# Altium PCB Danfoss302Pi_Interface.PcbDoc
Units mm, origin at the board's own origin, x right, y up, seen from the top; angles counter-clockwise.
Board outline 174 x 70 mm, 2 copper layers (Top Layer, Bottom Layer); 33 components, 49 nets, 239 pads, 36 vias.
Unrouted connection lines stored in the file: 6.
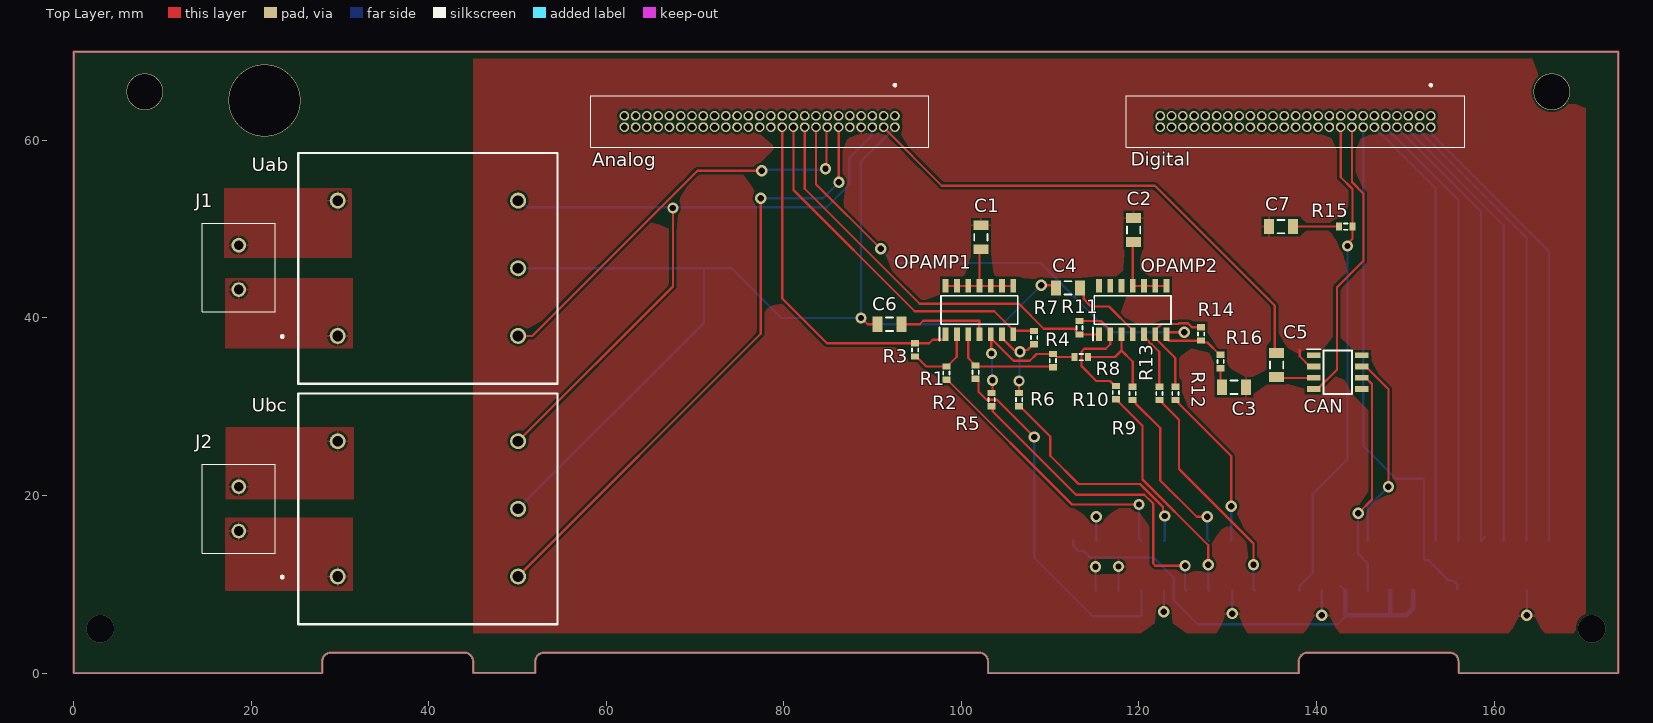
[diagram p0: Top Layer view]
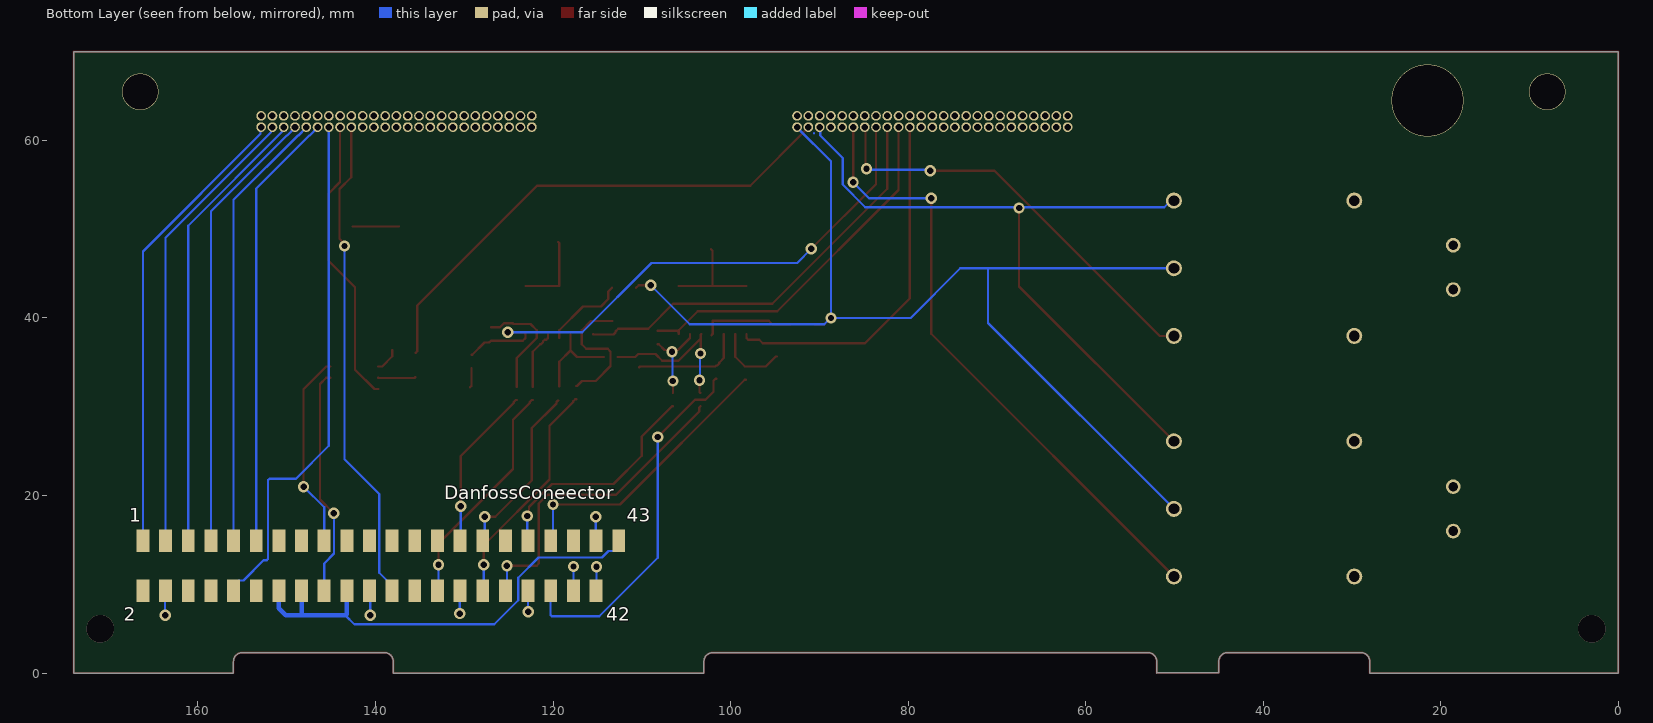
[diagram p1: Bottom Layer view, seen from below]

## Layer stack, top to bottom
Top Solder: solder mask 0.0102, Solder Resist, Dk 3.5
Top Layer: signal copper 0.0356
Dielectric 1: dielectric 0.32, FR-4, Dk 4.8
Bottom Layer: signal copper 0.0356
Bottom Solder: solder mask 0.0102, Solder Resist, Dk 3.5

## Board outline
0,0 28,0 28,1.3 cw(c29,1.3) 29,2.3 43.987,2.3 44,2.313 cw(c44,1.313) 45,1.313 45,0.013 51.987,0.013 52,0 52,1.3 cw(c53,1.3) 53,2.3 102,2.3 cw(c102,1.3) 103,1.3 103,0 138,0 138,1.3 cw(c139,1.3) 139,2.3 155,2.3 cw(c155,1.3) 156,1.3 156,0 174,0 174,70 0,70

## Design rules (kind name [scope] priority, off if disabled: settings)
Clearance [All] p1: gap=0.254 ignorepadtopadclearanceinfootprint=FALSE except(0: Arc-Hole Track-Hole SMDPad-Hole THPad-Hole Via-Hole Fill-Hole Poly-Hole Region-Hole Text-Hole)
PolygonConnect [All] p1: connectstyle=Relief reliefconductorwidth=0.254 reliefentries=4 polygonreliefangle="90 Angle" airgapwidth=0.254
RoomDefinition Danfoss302Pi_Interface [InComponentClass('Danfoss302Pi_Interface')] p1: confinementstyle=ConfineIn formatcopy=TRUE lockcomponents=FALSE outline 175.1,1.5 345.499,1.5 345.499,64.2 175.1,64.2
RoutingVias [All] p1: holewidth=0.711 width=1.27 viastyle="Through Hole" minholewidth=0.711 minwidth=1.27 maxholewidth=0.711 maxwidth=1.27
SolderMaskExpansion [All] p1: expansion=0.102 istentingtop=FALSE
Width [All] p1: maxlimit=0.254 minlimit=0.254 preferedwidth=0.254
30 further rules are at their usual default settings.

## Components (designator, comment, footprint, x,y, rotation, side; value= is the part's Value field where it differs from the comment)
Analog "SHF-125-01-L-D-TH-TR" SHF12501LDTHTR 92.51,62.77 r180 top
C1 "Cap" C1206 102.2,49.1 r90 top value=100pF
C2 "Cap" C1206 119.4,49.9 r90 top value=100pF
C3 "Cap" C1206 130.7,32.2 r0 top value=100pF
C4 "Cap" C1206 112,43.4 r0 top value=100pF
C5 "Cap" C1206 135.5,34.7 r270 top value=100pF
C6 "Cap" C1206 91.9,39.3 r0 top value=100pF
C7 "Cap" C1206 136,50.3 r0 top value=100pF
CAN "L9616" SOIC127P600X175-8N 142.4,33.9 r0 top
DanfossConeector "DanfossConnector" DanfossConnector 166.962,8.03 r180 bottom
Digital "SHF-125-01-L-D-TH-TR" SHF12501LDTHTR 152.88,62.77 r180 top
J1 "282836-2" 2828362 18.6,43.2 r270 top
J2 "282836-2" 2828362 18.6,16 r270 top
OPAMP1 "TLC084ID" SOIC127P600X175-14N 102.03,40.9 r90 top
OPAMP2 "TLC084ID" SOIC127P600X175-14N 119.3,40.9 r90 top
R1 "Res3" J1-0603 98.3,33.8 r90 top value=2200
R2 "Res3" J1-0603 101.6,33.9 r90 top value=2200
R3 "Res3" J1-0603 94.8,36.4 r90 top value=2200
R4 "Res3" J1-0603 110.3,35.2 r90 top value=2200
R5 "Res3" J1-0603 103.4,30.8 r90 top value=2200
R6 "Res3" J1-0603 106.5,30.8 r90 top value=2200
R7 "Res3" J1-0603 108.2,37.8 r90 top value=2200
R8 "Res3" J1-0603 113.5,35.6 r0 top value=2200
R9 "Res3" J1-0603 117.4,31.6 r90 top value=2200
R10 "Res3" J1-0603 119.3,31.5 r90 top value=2200
R11 "Res3" J1-0603 113.3,38.9 r90 top value=2200
R12 "Res3" J1-0603 124.1,31.5 r90 top value=27k
R13 "Res3" J1-0603 122.3,31.5 r90 top value=2200
R14 "Res3" J1-0603 127,38.2 r90 top value=2200
R15 "Res3" J1-0603 143.3,50.3 r0 top value=108G
R16 "Res3" J1-0603 129.2,35.1 r270 top value=2200
Uab "LV25P" LV-25-P 39.9,45.6 r0 top
Ubc "LV25P" LV-25-P 39.9,18.5 r0 top

## Footprints (in the part's own frame and the unit in brackets; to place one, negate y for a bottom-side part, rotate by r counter-clockwise, add the part's x,y. Pads: shape width x height; smd on the part's side, far side on the other; paste and mask are expansions set on the pad)
2828362 [mm]
  round 1.65 hole 1.1: 1(0,0) 2(-5,0)
  silkscreen extent -7.5,-4.1 2.5,4.1, body extent -8.09,-4.1 2.51,4.1, height 10.02
C1206 [mm] "Chip Capacitor, Body 3.2x1.6mm, IPC High Density"
  rect 1.1x1.7 smd: 1(-1.35,0) 2(1.35,0)
  silkscreen extent -0.4,-0.75 0.4,0.75, body extent -1.7,-0.9 1.7,0.9, height 1.3
DanfossConnector [mm]
  rect 1.45x2.54 smd: 1(0.762,6.858) 2(0.762,1.27) 3(3.314,6.858) 4(3.314,1.27) 5(5.866,6.858) 6(5.866,1.27) 7(8.418,6.858) 8(8.418,1.27) 9(10.97,6.858) 10(10.97,1.27) 11(13.522,6.858) 12(13.522,1.27) 13(16.075,6.858) 14(16.075,1.27) 15(18.627,6.858) 16(18.627,1.27) 17(21.179,6.858) 18(21.179,1.27) 19(23.731,6.858) 20(23.731,1.27) 21(26.283,6.858) 22(26.283,1.27) 23(28.835,6.858) 24(28.835,1.27) 25(31.387,6.858) 26(31.387,1.27) 27(33.939,6.858) 28(33.939,1.27) 29(36.491,6.858) 30(36.491,1.27) 31(39.043,6.858) 32(39.043,1.27) 33(41.595,6.858) 34(41.595,1.27) 35(44.148,6.858) 36(44.148,1.27) 37(46.7,6.858) 38(46.7,1.27) 39(49.252,6.858) 40(49.252,1.27) 41(51.804,6.858) 42(51.804,1.27) 43(54.356,6.858)
J1-0603 [mm] "Chip Resistor, Body 1.6x0.8mm, IPC High Density"
  rect 0.7x0.9 smd: 1(-0.75,0) 2(0.75,0)
  silkscreen extent -0.2,-0.35 0.2,0.35, body extent -0.85,-0.48 0.85,0.48, height 0.9
LV-25-P [mm]
  round 1.8 hole 1.2: 1(-10.16,-7.62) 2(10.16,-7.62) 3(10.16,0) 4(10.16,7.62) 5(-10.16,7.62)
  silkscreen extent -16.54,-13 14.6,13, body extent -13.6,-13 15.6,13, height 16.4
SHF12501LDTHTR [mm]
  round 1.1 hole 0.74: 1(0,0) 2(0,1.27) 3(1.27,0) 4(1.27,1.27) 5(2.54,0) 6(2.54,1.27) 7(3.81,0) 8(3.81,1.27) 9(5.08,0) 10(5.08,1.27) 11(6.35,0) 12(6.35,1.27) 13(7.62,0) 14(7.62,1.27) 15(8.89,0) 16(8.89,1.27) 17(10.16,0) 18(10.16,1.27) 19(11.43,0) 20(11.43,1.27) 21(12.7,0) 22(12.7,1.27) 23(13.97,0) 24(13.97,1.27) 25(15.24,0) 26(15.24,1.27) 27(16.51,0) 28(16.51,1.27) 29(17.78,0) 30(17.78,1.27) 31(19.05,0) 32(19.05,1.27) 33(20.32,0) 34(20.32,1.27) 35(21.59,0) 36(21.59,1.27) 37(22.86,0) 38(22.86,1.27) 39(24.13,0) 40(24.13,1.27) 41(25.4,0) 42(25.4,1.27) 43(26.67,0) 44(26.67,1.27) 45(27.94,0) 46(27.94,1.27) 47(29.21,0) 48(29.21,1.27) 49(30.48,0) 50(30.48,1.27)
  silkscreen extent -3.81,-3.56 34.29,3.56, body extent -3.81,-2.29 34.29,3.56, height 5.43
SOIC127P600X175-8N [mm]
  rect 1.525x0.65 smd: 1(-2.712,1.905) 2(-2.712,0.635) 3(-2.712,-0.635) 4(-2.712,-1.905) 5(2.712,-1.905) 6(2.712,-0.635) 7(2.712,0.635) 8(2.712,1.905)
  silkscreen extent -3.47,-2.45 1.6,2.58, body extent -3,-2.45 3,2.45, height 1.75
SOIC127P600X175-14N [mm]
  rect 1.525x0.65 smd: 1(-2.712,3.81) 2(-2.712,2.54) 3(-2.712,1.27) 4(-2.712,0) 5(-2.712,-1.27) 6(-2.712,-2.54) 7(-2.712,-3.81) 8(2.712,-3.81) 9(2.712,-2.54) 10(2.712,-1.27) 11(2.712,0) 12(2.712,1.27) 13(2.712,2.54) 14(2.712,3.81)
  silkscreen extent -3.47,-4.33 1.6,4.48, body extent -3.01,-4.32 3.01,4.34, height 1.75

## Part data
Analog Digital: "Connector", Manufacturer_Name=SAMTEC, Mouser Part Number=200-SHF12501LDTHTR, Datasheet Link=http://suddendocs.samtec.com/catalog_english/shf.pdf, Height=5.33mm, Manufacturer_Part_Number=SHF-125-01-L-D-TH-TR, Mouser Price/Stock=https://www.mouser.com/Search/Refine.aspx?Keyword=200-SHF12501LDTHTR
C1 C2 C3 C4 C5 C6 C7: library part "Cap Semi", "Capacitor (Semiconductor SIM Model)", LatestRevisionDate=29-May-2009, LatestRevisionNote="IPC-7351 Footprint Added.", PackageDescription="Chip Capacitor", PackageReference=C1206, Published=8-Jun-2000, Publisher="Altium Limited"
CAN: "Integrated Circuit", Manufacturer_Name=STMicroelectronics, Mouser Part Number=511-L9616, Arrow Part Number=L9616, Arrow Price/Stock=https://www.arrow.com/en/products/l9616/stmicroelectronics?region=nac, Datasheet Link=http://www.st.com/st-web-ui/static/active/en/resource/technical/document/datasheet/CD00002241.pdf, Height=1.75mm, Manufacturer_Part_Number=L9616, Mouser Price/Stock=https://www.mouser.co.uk/ProductDetail/STMicroelectronics/L9616?qs=Au9%252BK7QVGzVbR%252BTIYyk1Fg%3D%3D
J1 J2: "Connector", Manufacturer_Name="TE Connectivity", Mouser Part Number=571-2828362, Arrow Part Number=282836-2, Arrow Price/Stock=https://www.arrow.com/en/products/282836-2/te-connectivity?region=europe, Datasheet Link=https://www.te.com/commerce/DocumentDelivery/DDEController?Action=showdoc&DocId=Customer+Drawing%7F282836%7FJ%7Fpdf%7FEnglish%7FENG_CD_282836_J.pdf%7F282836-2, Height=10mm, Manufacturer_Part_Number=282836-2, Mouser Price/Stock=https://www.mouser.co.uk/ProductDetail/TE-Connectivity/282836-2?qs=A%252Bip%252BNCYi6Ohx9vaQ1l4dg%3D%3D
OPAMP1 OPAMP2: "Integrated Circuit", Manufacturer_Name="Texas Instruments", Mouser Part Number=595-TLC084ID, Arrow Part Number=TLC084ID, Arrow Price/Stock=https://www.arrow.com/en/products/tlc084id/texas-instruments, Datasheet Link=http://www.ti.com/lit/gpn/TLC084, Height=1.75mm, Manufacturer_Part_Number=TLC084ID, Mouser Price/Stock=https://www.mouser.co.uk/ProductDetail/Texas-Instruments/TLC084ID?qs=AMJt07B76uvL3RFY0L2wYQ%3D%3D
R1 R2 R3 R4 R5 R6 R7 R8 R9 R10 R11 R12 R13 R14 R15 R16: "Resistor", LatestRevisionDate=29-May-2009, LatestRevisionNote="IPC-7351 Footprint Added.", PackageDescription="Chip Resistor", PackageReference=J1-0603, Published=8-Jun-2000, Publisher="Altium Limited"
Uab Ubc: "Undefined or Miscellaneous", Manufacturer_Name=LEM, Manufacturer_Part_Number=LV25P

## Via types
v1: diameter 1.27, hole 0.711, Top Layer to Bottom Layer, 31 vias
v2: diameter 4.1, hole 4, Top Layer to Bottom Layer, 2 vias
v3: diameter 3.1, hole 3.1, Top Layer to Bottom Layer, 2 vias
v4: diameter 8.1, hole 8, Top Layer to Bottom Layer, 1 vias

## Nets (pads, with @x,y where several pads share a name; then routed paths per layer and width w, separated by ;. In a path a pad name is that pad's centre, name@x,y a point inside that pad or via, vN(x,y) a via of type N, cw(c..) or ccw(c..) an arc to the next point about the centre after c; other vN are vias at no path point)
5V: Analog.4 C5.1 | length 57.8
  Top Layer w0.254: Analog.4 91.24,61.453 97.793,54.9 121.8,54.9 135.3,41.4 135.3,36.25 C5.1
+15V: Analog.2 C4.1 C6.1 Uab.3 Ubc.3 | length 126.1
  Top Layer w0.254: v1(88.7,40) 88.737,40 89.437,39.3 C6.1 ; v1(109,43.7) 110.35,43.7 C4.1
  Bottom Layer w0.254: Ubc.3 71,39.44 71,45.6 ; Uab.3 71,45.6 ; Analog.2 92.51,61.453 88.7,57.643 v1(88.7,40) ; v1(109,43.7) 104.6,39.3 89.437,39.3 88.737,40 v1(88.7,40) ; 71,45.6 74.117,45.6 79.717,40 v1(88.7,40)
-15V: Analog.6 Uab.4 Ubc.4 | length 79.7
  Top Layer w0.254: Ubc.4 67.5,43.56 v1(67.5,52.4)
  Bottom Layer w0.254: Uab.4 50.4,53.22 51.136,52.484 84.821,52.484 87.363,55.026 87.363,58.026 89.906,60.569 89.906,61.436 Analog.6
Ch4: Analog.16 OPAMP2.7 R14.1 R16.1 | length 64.2
  Top Layer w0.254: Analog.16 83.62,55.08 v1(90.9,47.8) ; v1(125.1,38.4) 123.308,38.4 123.11,38.202 OPAMP2.7 123.11,37.75 123.41,37.45 R14.1 127.223,37.227 127.723,37.227 129.1,35.85 R16.1
  Bottom Layer w0.254: v1(90.9,47.8) 92.5,46.2 108.9,46.2 116.7,38.4 v1(125.1,38.4)
GND: Analog.8 C1.2 C2.2 C3.2 C7.1 CAN.2 DanfossConeector.4 DanfossConeector.22 DanfossConeector.30 DanfossConeector.36 DanfossConeector.40 DanfossConeector.41 DanfossConeector.42 | length 21.8
  Top Layer w0.254: 138.1,36.4 138.1,35.685 139.25,34.535 CAN.2
  Bottom Layer w0.254: v1(115.1,11.984) 115.1,9.358 DanfossConeector.42 ; DanfossConeector.41@115.2,14.9 115.188,14.888 DanfossConeector.41 115.2,14.93 v1(115.2,17.6) ; v1(117.7,12) 117.7,9.31 DanfossConeector.40 ; v1(122.8,6.9) 122.995,7.095 122.995,7.305 122.814,7.486 DanfossConeector.36 ; DanfossConeector.30 130.5,9.271 v1(130.5,6.7) ; v1(140.6,6.516) 140.6,9.221 DanfossConeector.22 ; DanfossConeector.4 163.7,9.248 v1(163.7,6.5)
NetAnalog_18: Analog.18 OPAMP2.1 R11.1 | length 47
  Top Layer w0.254: Analog.18 82.35,54.55 95.3,41.6 106.489,41.6 109.289,38.8 112.65,38.8 112.977,38.473 112.977,38.373 113.2,38.15 115.452,38.15 OPAMP2.1
NetAnalog_20: Analog.20 OPAMP1.7 R7.2 | length 41.3
  Top Layer w0.254: Analog.20 81.08,54.42 94.742,40.758 103.708,40.758 105.84,38.625 OPAMP1.7@105.84,38.352 ; OPAMP1.7 OPAMP1.7@105.84,38.352 ; R7.2 106.038,38.55 OPAMP1.7@105.84,38.352
NetAnalog_22: Analog.22 OPAMP1.1 R3.2 | length 40.5
  Top Layer w0.254: Analog.22 79.81,42.19 84.85,37.15 R3.2 96.371,37.15 96.774,37.552 98.022,37.552 98.22,37.75 OPAMP1.1
NetC1_1: C1.1 OPAMP1.8 OPAMP1.9 OPAMP1.10 OPAMP1.11 OPAMP1.12 OPAMP1.13 OPAMP1.14 | length 11.8
  Top Layer w0.254: OPAMP1.14 OPAMP1.13 OPAMP1.12 OPAMP1.11 ; C1.1 102.03,47.58 OPAMP1.11 ; OPAMP1.8 OPAMP1.9 OPAMP1.10 OPAMP1.11
NetC2_1: C2.1 OPAMP2.8 OPAMP2.9 OPAMP2.10 OPAMP2.11 | length 8.8
  Top Layer w0.254: C2.1 119.3,48.45 OPAMP2.11 OPAMP2.10 OPAMP2.9 OPAMP2.8
NetC3_1: C3.1 R16.2 | length 2.2
  Top Layer w0.254: R16.2 129.2,32.35 C3.1
NetC4_2: C4.2 OPAMP2.4 | length 9.3
  Top Layer w0.254: C4.2 113.773,42.977 113.773,42.127 114.6,41.3 116.625,41.3 119.3,38.625 OPAMP2.4 OPAMP2.4@119.3,37.75
NetC5_2: C5.2 CAN.3 | length 4.3
  Top Layer w0.254: C5.2 135.617,33.233 139.655,33.233 CAN.3
NetC6_2: C6.2 OPAMP1.4 | length 10.6
  Top Layer w0.254: C6.2 95.3,39.3 95.7,39.7 102,39.7 102,39.3 102.015,39.285 102.015,38.203 OPAMP1.4 OPAMP1.4@102.149,38.069
NetC7_2: C7.2 R15.1 | length 5.2
  Top Layer w0.254: C7.2 R15.1
NetCAN_4: CAN.4 Digital.16 | length 32.6
  Top Layer w0.254: CAN.4 140.125,31.995 142.3,34.17 142.3,43.45 145.3,46.45 145.3,54 143.99,55.31 Digital.16
NetCAN_6: CAN.6 DanfossConeector.18 | length 25.8
  Top Layer w0.254: v1(144.7,18) 146.256,19.556 146.256,32.559 145.55,33.265 CAN.6
  Bottom Layer w0.254: v1(144.7,18) 144.677,17.977 144.677,13.46 145.783,12.354 DanfossConeector.18
NetCAN_7: CAN.7 DanfossConeector.17 | length 22.1
  Top Layer w0.254: CAN.7 145.55,34.535 148.1,31.985 v1(148.1,21)
  Bottom Layer w0.254: DanfossConeector.17 145.783,18.683 v1(148.1,21)
NetDanfossConeector_1: DanfossConeector.1 Digital.2 | length 52.1
  Bottom Layer w0.254: Digital.2 152.944,61.436 152.944,60.756 166.2,47.5 DanfossConeector.1
NetDanfossConeector_3: DanfossConeector.3 Digital.4 | length 51.7
  Bottom Layer w0.254: Digital.4 151.772,61.338 151.772,60.928 163.648,49.052 DanfossConeector.3 ; 151.61,62.683 151.61,62.73 ; 151.61,62.983 151.61,63.03
NetDanfossConeector_5: DanfossConeector.5 Digital.6 | length 51.2
  Bottom Layer w0.254: Digital.6 150.502,61.338 150.502,60.998 161.096,50.404 DanfossConeector.5 ; 150.34,62.683 150.34,62.73 ; 150.34,62.983 150.34,63.03
NetDanfossConeector_7: DanfossConeector.7 Digital.8 | length 51.2
  Bottom Layer w0.254: Digital.8 149.07,61.453 149.954,60.569 150.001,60.569 158.544,52.026 DanfossConeector.7 DanfossConeector.7@158.96,15.304 ; 149.07,62.983 149.07,63.03
NetDanfossConeector_9: DanfossConeector.9 Digital.10 | length 50.1
  Bottom Layer w0.254: Digital.10 147.8,61.453 148.684,60.569 148.731,60.569 155.992,53.308 DanfossConeector.9 ; 147.8,62.983 147.8,63.03
NetDanfossConeector_10: DanfossConeector.10 Digital.14 | length 58.7
  Bottom Layer w0.254: Digital.14 145.26,25.601 148.961,21.9 151.951,21.9 152.1,21.751 152.1,12.849 152.249,12.7 152.618,12.7 154.875,10.443 155.394,10.443 155.846,9.991 DanfossConeector.10@155.846,9.446
NetDanfossConeector_11: DanfossConeector.11 Digital.12 | length 49.5
  Bottom Layer w0.254: Digital.12 146.53,61.453 147.414,60.569 147.461,60.569 153.44,54.59 DanfossConeector.11 ; 146.53,62.983 146.53,63.03
NetDanfossConeector_24: DanfossConeector.24 Digital.18 R15.2 | length 55.3
  Top Layer w0.254: Digital.18 142.72,55.862 144.05,54.532 R15.2 144.05,48.925 143.5,48.375 v1(143.5,48.1)
  Bottom Layer w0.254: DanfossConeector.24@138.2,9.373 DanfossConeector.24 138.127,9.845 139.573,11.291 139.573,20.173 143.5,24.1 v1(143.5,48.1)
NetDanfossConeector_28: DanfossConeector.28 R13.1 | length 26
  Top Layer w0.254: R13.1 122.4,30.75 122.623,30.527 122.623,30.427 124.5,28.55 124.5,23 132.9,14.6 v1(132.9,12.2)
  Bottom Layer w0.254: v1(132.9,12.2) 132.9,9.423 DanfossConeector.28
NetDanfossConeector_29: DanfossConeector.29 R12.1 | length 18.6
  Top Layer w0.254: R12.1 124.2,30.75 124.423,30.527 124.423,30.427 130.4,24.45 v1(130.4,18.8)
  Bottom Layer w0.254: v1(130.4,18.8) 130.4,14.959 DanfossConeector.29
NetDanfossConeector_31: DanfossConeector.31 R10.1 | length 20.1
  Top Layer w0.254: R10.1@119.4,30.7 119.45,30.7 119.623,30.527 119.623,30.377 122.4,27.6 122.4,21.7 126.5,17.6 v1(127.7,17.6)
  Bottom Layer w0.254: v1(127.7,17.6) 127.7,15.107 DanfossConeector.31
NetDanfossConeector_32: DanfossConeector.32 R9.1 | length 26
  Top Layer w0.254: R9.1 117.5,30.85 117.723,30.627 117.723,30.527 120.4,27.85 120.4,21.8 127.8,14.4 v1(127.8,12.2)
  Bottom Layer w0.254: v1(127.8,12.2) 127.8,9.419 DanfossConeector.32
NetDanfossConeector_34: DanfossConeector.34 R5.1 | length 36.3
  Top Layer w0.254: R5.1 103.532,29.918 103.532,29.468 112.9,20.1 120.6,20.1 121.6,19.1 121.6,12.349 121.849,12.1 v1(125.2,12.1)
  Bottom Layer w0.254: v1(125.2,12.1) 125.2,9.467 DanfossConeector.34
NetDanfossConeector_35: DanfossConeector.35 R6.1 | length 26.1
  Top Layer w0.254: R6.1 106.6,30.05 110.011,26.638 110.011,24.489 113.2,21.3 120.118,21.3 122.706,18.713 122.706,17.894 v1(122.9,17.7)
  Bottom Layer w0.254: DanfossConeector.35 122.9,14.974 v1(122.9,17.7)
NetDanfossConeector_37: DanfossConeector.37 R1.1 | length 31.7
  Top Layer w0.254: R1.1 98.4,33.05 112.45,19 v1(120,19)
  Bottom Layer w0.254: v1(120,19) 120,15.15 DanfossConeector.37
NetDanfossConeector_38: DanfossConeector.38 R2.1 | length 41.3
  Top Layer w0.254: R2.1 101.7,33.15 101.923,32.927 101.923,31.688 102.83,30.781 104.019,30.781 v1(108.2,26.6)
  Bottom Layer w0.254: v1(108.2,26.6) 108.2,13 114.8,6.4 120.151,6.4 120.3,6.549 120.3,9.262 DanfossConeector.38
NetJ1_1: J1.1 Uab.1
NetJ1_2: J1.2 Uab.5
NetJ2_1: J2.1 Ubc.1
NetJ2_2: J2.2 Ubc.5
NetOPAMP1_2: OPAMP1.2 R1.2 R3.1 | length 8.1
  Top Layer w0.254: R3.1 94.9,35.65 96,34.55 R1.2 98.4,34.55 99.49,35.64 OPAMP1.2
NetOPAMP1_3: OPAMP1.3 R2.2 R4.1 | length 12.7
  Top Layer w0.254: OPAMP1.3 100.76,35.49 101.277,34.973 101.277,34.873 101.5,34.65 R2.2 101.7,34.55 110.2,34.55 R4.1
NetOPAMP1_5: OPAMP1.5 R4.2 R5.2 R8.1 | length 17.7
  Top Layer w0.254: OPAMP1.5 103.35,38.138 OPAMP1.5@103.35,37.7 ; R5.2 103.5,31.65 v1(103.5,33) ; v1(103.4,36) 103.35,36.05 OPAMP1.5@103.35,37.7 ; R8.1 110.75,35.6 110.4,35.95 108.461,35.95 107.695,35.184 105.866,35.184 OPAMP1.5@103.35,37.7
  Bottom Layer w0.254: v1(103.4,36) 103.45,35.95 103.45,33.05 v1(103.5,33)
NetOPAMP1_6: OPAMP1.6 R6.2 R7.1 | length 9.8
  Top Layer w0.254: OPAMP1.6 104.57,37.75 105.926,36.394 106.406,36.394 v1(106.6,36.2) 106.794,36.394 107.444,36.394 108.1,37.05 R7.1 ; R6.2 v1(106.5,32.9)
  Bottom Layer w0.254: v1(106.5,32.9) 106.55,32.95 106.55,36.15 v1(106.6,36.2)
NetOPAMP2_2: OPAMP2.2 R9.2 R11.2 | length 15.5
  Top Layer w0.254: R11.2 115.735,39.65 116.76,38.625 OPAMP2.2 116.76,37.044 116.252,36.536 113.848,36.536 113.519,36.208 113.519,34.581 115.2,32.9 116.75,32.9 117.3,32.35 R9.2
NetOPAMP2_3: OPAMP2.3 R8.2 R10.2 | length 10.5
  Top Layer w0.254: R8.2 117.3,35.6 118.03,36.33 ; OPAMP2.3 118.03,36.33 ; R10.2@119.3,32.298 119.3,35.06 118.03,36.33
NetOPAMP2_5: OPAMP2.5 R13.2 | length 6.8
  Top Layer w0.254: OPAMP2.5 120.57,37.75 120.768,37.552 120.948,37.552 121.134,37.366 121.134,37.268 121.357,37.044 121.456,37.044 122.3,36.2 R13.2
NetOPAMP2_6: OPAMP2.6 R12.2 R14.2 | length 13
  Top Layer w0.254: R12.2 124.1,35.491 121.84,37.75 OPAMP2.6 121.84,38.625 122.546,39.331 124.461,39.331 124.546,39.416 125.521,39.416 125.987,38.95 R14.2
Vab: Analog.14 Uab.2 | length 47.2
  Top Layer w0.254: Uab.2 51.643,37.98 70.263,56.6 v1(77.5,56.6) ; v1(84.7,56.8) 84.795,56.895 84.795,61.405 Analog.14
  Bottom Layer w0.254: v1(77.5,56.6) 77.6,56.7 84.6,56.7 v1(84.7,56.8)
Vbc: Analog.12 Ubc.2 | length 69.7
  Top Layer w0.254: Ubc.2 77.4,38.22 v1(77.4,53.5) ; Analog.12 86.18,61.48 86.18,55.32 v1(86.2,55.3)
  Bottom Layer w0.254: v1(77.4,53.5) 84.4,53.5 v1(86.2,55.3)
VCC: DanfossConeector.14 DanfossConeector.16 DanfossConeector.20 DanfossConeector.43 | length 53.2
  Bottom Layer w0.254: DanfossConeector.43@112.6,14.894 DanfossConeector.43 112.606,14.343 113.204,13.745 113.767,13.745 114.496,13.016 121.632,13.016 123.92,10.728 123.92,8.212 126.633,5.5 142.38,5.5 143.38,6.5 ; DanfossConeector.20@142.7,9.831 DanfossConeector.20 ; 148.3,6.5 148.335,6.535
  Bottom Layer w0.508: DanfossConeector.20 143.231,6.649 143.38,6.5 148.3,6.5 150.1,6.5 150.887,7.287 DanfossConeector.14 ; 148.335,6.535 DanfossConeector.16
pads on no net: Analog.1 Analog.3 Analog.5 Analog.7 Analog.9 Analog.10 Analog.11 Analog.13 Analog.15 Analog.17 Analog.19 Analog.21 Analog.23 Analog.24 Analog.25 Analog.26 Analog.27 Analog.28 Analog.29 Analog.30 Analog.31 Analog.32 Analog.33 Analog.34 Analog.35 Analog.36 Analog.37 Analog.38 Analog.39 Analog.40 Analog.41 Analog.42 Analog.43 Analog.44 Analog.45 Analog.46 Analog.47 Analog.48 Analog.49 Analog.50 CAN.1 CAN.5 CAN.8 DanfossConeector.2 DanfossConeector.6 DanfossConeector.8 DanfossConeector.12 DanfossConeector.13 DanfossConeector.15 DanfossConeector.19 DanfossConeector.21 DanfossConeector.23 DanfossConeector.25 DanfossConeector.26 DanfossConeector.27 DanfossConeector.33 DanfossConeector.39 Digital.1 Digital.3 Digital.5 Digital.7 Digital.9 Digital.11 Digital.13 Digital.15 Digital.17 Digital.19 Digital.20 Digital.21 Digital.22 Digital.23 Digital.24 Digital.25 Digital.26 Digital.27 Digital.28 Digital.29 Digital.30 Digital.31 Digital.32 Digital.33 Digital.34 Digital.35 Digital.36 Digital.37 Digital.38 Digital.39 Digital.40 Digital.41 Digital.42 Digital.43 Digital.44 Digital.45 Digital.46 Digital.47 Digital.48 Digital.49 Digital.50 OPAMP2.12 OPAMP2.13 OPAMP2.14
copper on no net: | length 499.2
  Top Layer w0.254: 43.987,2.3 29,2.3 ccw(c29,1.3) 28,1.3 28,0 0,0 0,70 174,70 174,0 156,0 156,1.3 ccw(c155,1.3) 155,2.3 139,2.3 ccw(c139,1.3) 138,1.3 138,0 103,0 103,1.3 ccw(c102,1.3) 102,2.3 53,2.3 ccw(c53,1.3) 52,1.3 52,0 ; 44,2.313 cw(c44,1.313) 45,1.313 45,0.013 51.987,0.013
  other v2: 8,65.5 166.5,65.5
  other v3: 3,5 171,5
  other v4: 21.5,64.5

## Polygon pours and split planes (outlines as drawn)
GND on Top Layer "GND_L01_P000" (solid, remove dead copper, pour order 0): 45,69.2 170.35,69.2 170.35,4.5 169.85,4.5 45,4.5
NetJ1_2 on Top Layer "NETJ1_2_L01_P007" (solid, pour order 7): 31.239,54.6 31.339,54.7 31.339,46.8 16.939,46.8 16.939,54.6
NetJ1_1 on Top Layer "NETJ1_1_L01_P006" (solid, pour order 6): 31.35,44.5 31.45,44.6 31.45,36.6 17.05,36.6 17.05,44.5
NetJ2_1 on Top Layer "NETJ2_1_L01_P005" (solid, pour order 5): 31.45,17.5 31.45,9.3 17.05,9.3 17.05,17.5
NetJ2_2 on Top Layer "NETJ2_2_L01_P004" (solid, pour order 4): 31.55,27.7 31.55,19.6 17.15,19.6 17.15,27.7

## Dimensions
0,70 to 0,0 on Top Layer
0,70 to 174,70 on Top Layer

## Text inside footprints (layer, text, board x,y; h text height)
DanfossConeector: Bottom Overlay "1" at 167.724,17.047 h1.52; Bottom Overlay "2" at 168.359,5.871 h1.52; Bottom Overlay "42" at 114.003,5.871 h1.52; Bottom Overlay "43" at 111.717,17.047 h1.52